# EAGLE board uduino (EAGLE 5.00)
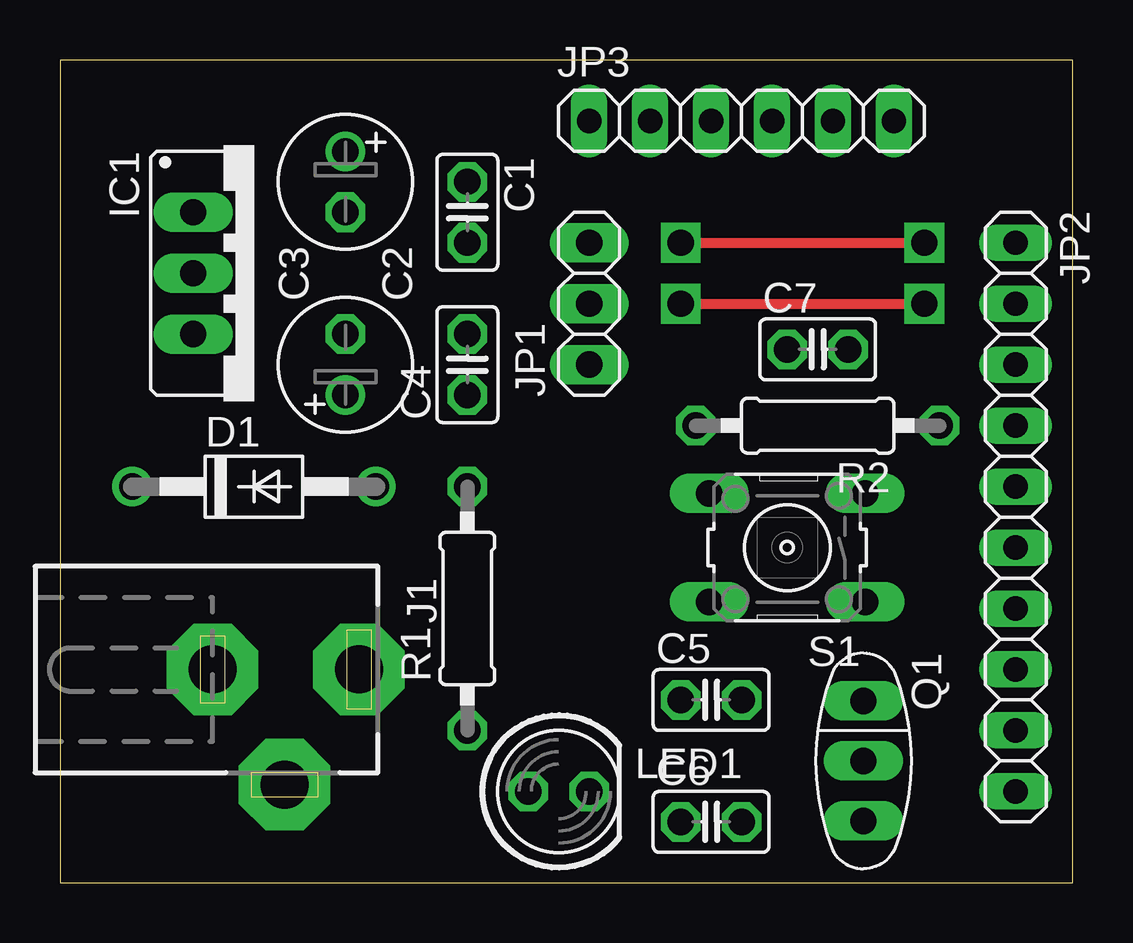
[diagram p0: board, top side]
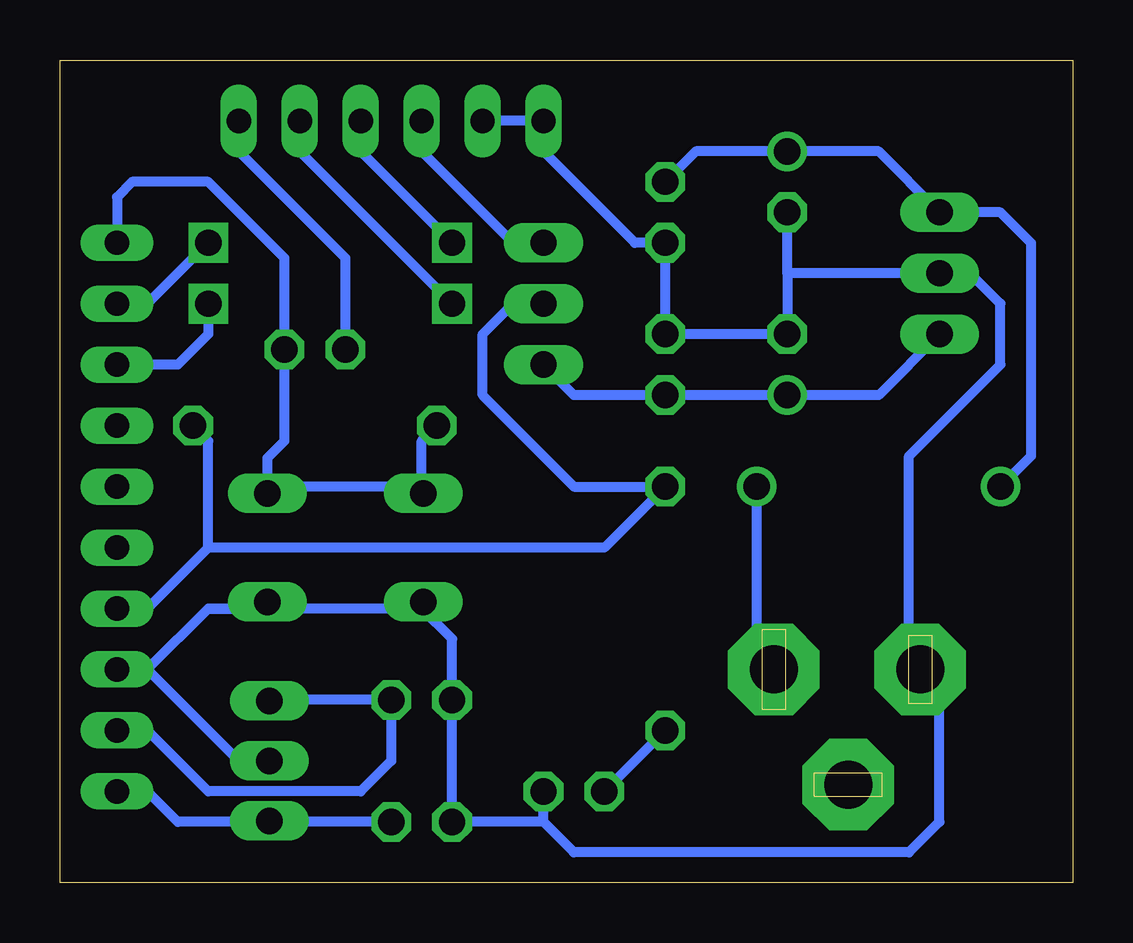
[diagram p1: board, bottom side, seen from below]

Size 42.21 x 34.28 mm. Coordinates in mm from the lower left corner, seen from the top.
Outline: 0,0 42.21,0 42.21,34.28 0,34.28 0,0
Copper layers (1*16): Top 0.035mm / dielectric 1.5mm / Bottom 0.035mm
Design rules "default": minimum track width 10mil, minimum drill 24mil, track to track 8mil, track to pad 8mil, pad to pad 8mil, via to via 8mil, smd to smd 8mil, copper to edge 40mil, drill to drill 8mil, minimum pad ring 10mil, minimum via ring 8mil, stop-mask expansion 4mil, vias tented up to drill 0mil, thermal gap 10mil

## Footprints (pad centres in the part's own frame; a part is rotated, then mirrored left to right if it is on the bottom)
C025-025X050 = drill 1.1 octagon: 1 -1.27,0; 2 1.27,0
E2,5-6 = drill 1.1 round: + -1.27,0 | drill 1.1 pad 1.6 octagon: - 1.27,0
DO41-10 = drill 1.1 round: A 5.08,0; C -5.08,0
78XXS = drill 1.1 long: GND 0,-2.54; IN -2.54,-2.54; OUT 2.54,-2.54
DCJ0202A = drill 2 pad 3.81 octagon: 1 0,3.1; 2 4.8,0; 3 0,-3
1X03 = drill 1.1 long: 1 -2.54,0; 2 0,0; 3 2.54,0
1X10 = drill 1.016 long: 1 -11.43,0; 2 -8.89,0; 3 -6.35,0; 4 -3.81,0; 5 -1.27,0; 6 1.27,0; 7 3.81,0; 8 6.35,0; 9 8.89,0; 10 11.43,0
1X06 = drill 1.016 long: 1 -6.35,0; 2 -3.81,0; 3 -1.27,0; 4 1.27,0; 5 3.81,0; 6 6.35,0
LED5MM = drill 1.1 octagon: A -1.27,0; K 1.27,0
CSTLS_G9 = drill 1.1 long: 1 -2.5,0; 2 0,0; 3 2.5,0
0207/10 = drill 1.1 octagon: 1 -5.08,0; 2 5.08,0
B3F-10XX = drill 1.1 long: 1 -3.251,2.261; 2 3.251,2.261; 3 -3.251,-2.261; 4 3.251,-2.261

## Placement (x,y rotation side)
C1  [C025-025X050]  16.98,27.93 270 top
C2  [E2,5-6]  11.9,29.21 270 top
C3  [E2,5-6]  11.9,21.59 90 top
C4  [C025-025X050]  16.98,21.59 90 top
C5  [C025-025X050]  27.14,7.62 0 top
C6  [C025-025X050]  27.14,2.54 0 top
C7  [C025-025X050]  31.58,22.22 0 top
D1  1N4004  [DO41-10]  8.09,16.5 0 top
IC1  [78XXS]  8.09,25.39 270 top
J1  DCJ0202  [DCJ0202A]  9.36,8.89 270 top
JP1  [1X03]  22.06,24.13 90 top
JP2  [1X10]  39.84,15.23 270 top
JP3  [1X06]  28.41,31.75 0 top
LED1  [LED5MM]  20.79,3.8 0 top
Q1  [CSTLS_G9]  33.49,5.08 270 top
R1  [0207/10]  16.98,11.43 90 top
R2  [0207/10]  31.58,19.05 180 top
S1  [B3F-10XX]  30.31,13.96 180 top

## Library data of the parts
C1-C7 D1 IC1 J1 JP1-JP3 LED1 Q1 R1 R2 S1 = Uduino

## Nets
+5V: JP1.2 JP2.7 R1.2 R2.1
GND: C1.2 C2.- C3.- C4.2 C5.1 C6.1 IC1.GND J1.3 JP2.8 JP3.1 JP3.2 LED1.K Q1.2 S1.1 S1.2
N$1: D1.A J1.1
N$2: C1.1 C2.+ D1.C IC1.IN
N$3: C3.+ C4.1 IC1.OUT JP1.1
N$5: LED1.A R1.1
RESET: C7.2 JP2.1 R2.2 S1.3 S1.4
RTS#: C7.1 JP3.6
RXD: JP2.2 JP3.4
TXD: JP2.3 JP3.5
USB_5V: JP1.3 JP3.3
XTAL1: C5.2 JP2.9 Q1.1
XTAL2: C6.2 JP2.10 Q1.3

## Tracks (layer width: path | path; a pad name or v marks a point on that pad's centre or on a via)
+5V
  Bottom 0.406: JP2.7 38.57,11.43 36.03,13.96 | JP1.2 23.33,24.13 24.6,22.86 24.6,20.32 20.79,16.5 R1.2 19.52,13.96 36.03,13.96 | R2.1 36.03,18.41 36.03,13.96
GND
  Bottom 0.406: 11.9,25.39 C2.- | C4.2 C1.2 18.25,26.67 22.06,30.47 JP3.1 JP3.2 | C3.- C4.2 | C3.- C4.2 | 11.9,25.39 C3.- | 11.9,25.39 IC1.GND 4.28,25.39 3.01,24.13 3.01,21.59 6.82,17.78 6.82,8.89 | 38.57,8.89 JP2.8 | Q1.2 34.76,5.08 38.57,8.89 | 6.82,8.89 J1.3 | 6.82,8.89 5.55,7.62 5.55,2.54 6.82,1.27 20.79,1.27 22.06,2.54 | S1.1 33.49,11.63 33.49,11.43 36.03,11.43 | 36.03,11.43 38.57,8.89 | 27.14,11.43 36.03,11.43 | 27.14,11.43 27.14,11.63 S1.2 | 27.14,11.43 25.87,10.16 C5.1 C6.1 22.06,2.54 | 22.06,2.54 LED1.K
N$1
  Bottom 0.406: J1.1 13.17,9.59 D1.A
N$2
  Bottom 0.406: C1.1 15.71,30.47 C2.+ 8.09,30.47 IC1.IN 3.01,27.93 1.74,26.67 1.74,17.78 D1.C
N$3
  Bottom 0.406: IC1.OUT 8.09,20.32 C3.+ C4.1 20.79,20.32 JP1.1
N$5
  Bottom 0.406: LED1.A R1.1
RESET
  Bottom 0.406: JP2.1 39.84,28.57 39.2,29.21 36.03,29.21 32.85,26.03 C7.2 32.85,18.41 33.57,17.7 S1.3 33.49,16.3 33.49,16.5 27.34,16.5 S1.4 27.14,16.3 27.14,18.41 R2.2
RTS#
  Bottom 0.406: JP3.6 34.76,30.47 30.31,26.03 C7.1
RXD  (via drill 1.1)
  Top 0.406: v25.87,26.67 v36.03,26.67
  Bottom 0.406: v36.03,26.67 38.57,24.13 JP2.2 | JP3.4 29.68,30.47 v25.87,26.67
TXD  (via drill 1.1)
  Top 0.406: v25.87,24.13 v36.03,24.13
  Bottom 0.406: v36.03,24.13 36.03,22.86 37.3,21.59 JP2.3 | JP3.5 32.22,30.47 v25.87,24.13
USB_5V
  Bottom 0.406: JP1.3 23.33,26.67 27.14,30.47 JP3.3
XTAL1
  Bottom 0.406: Q1.1 32.22,7.62 C5.2 28.41,5.08 29.68,3.8 36.03,3.8 38.57,6.35 JP2.9
XTAL2
  Bottom 0.406: 32.22,2.54 Q1.3 | C6.2 32.22,2.54 | JP2.10 38.57,3.8 37.3,2.54 32.22,2.54